# Altium PCB PCB1.PcbDoc
Units mm, origin at the board's own origin, x right, y up, seen from the top; angles counter-clockwise.
Board outline 66.93 x 66.29 mm, 2 copper layers (Top Layer, Bottom Layer); 6 components, 30 nets, 68 pads, 9 vias.
Unrouted connection lines stored in the file: 1.
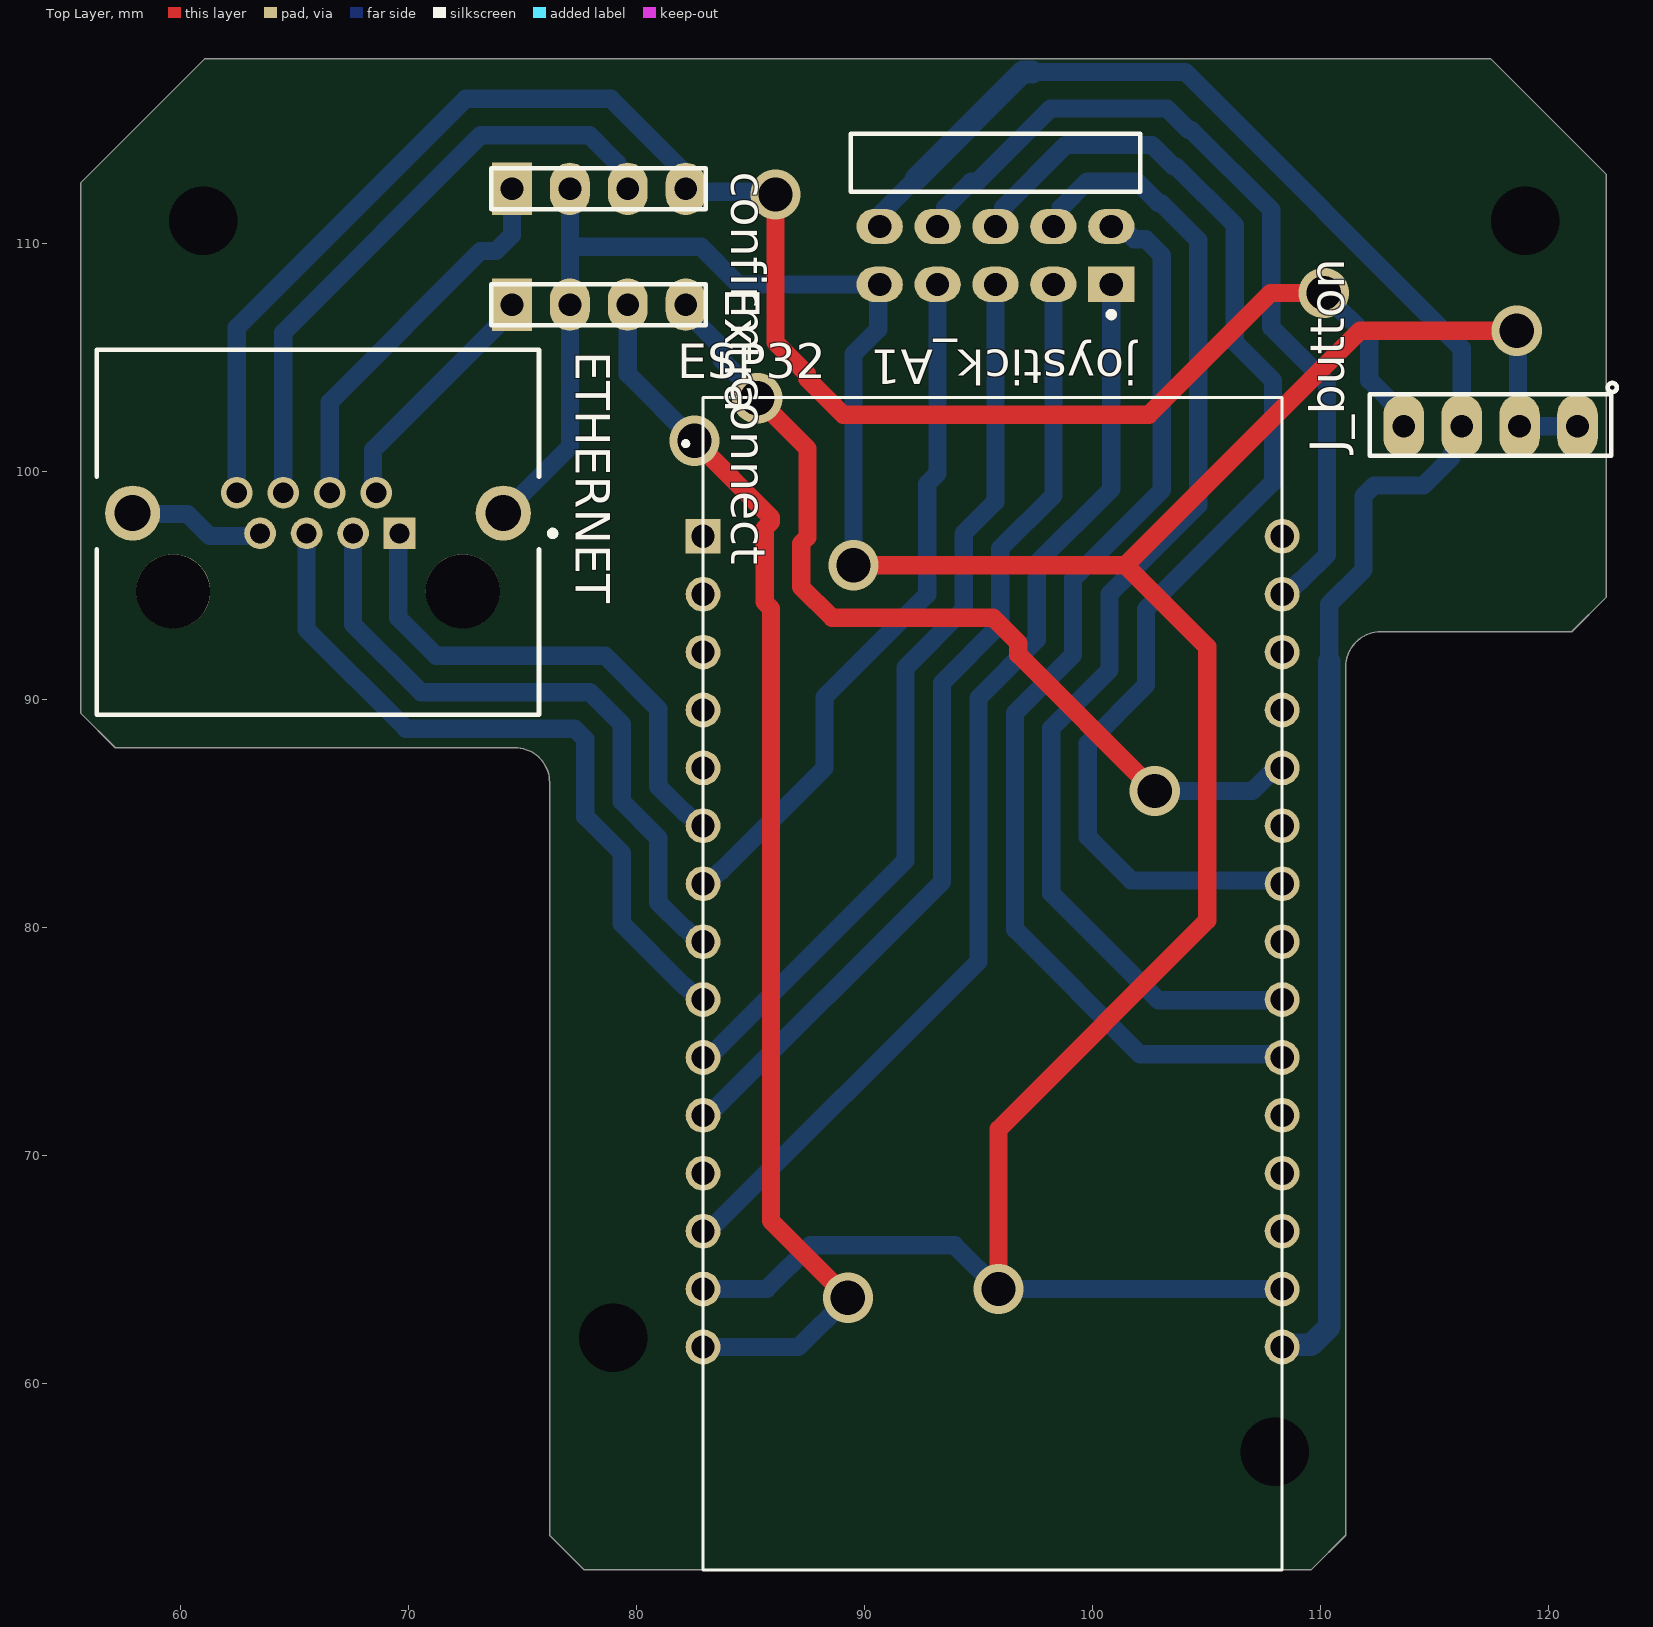
[diagram p0: Top Layer view]
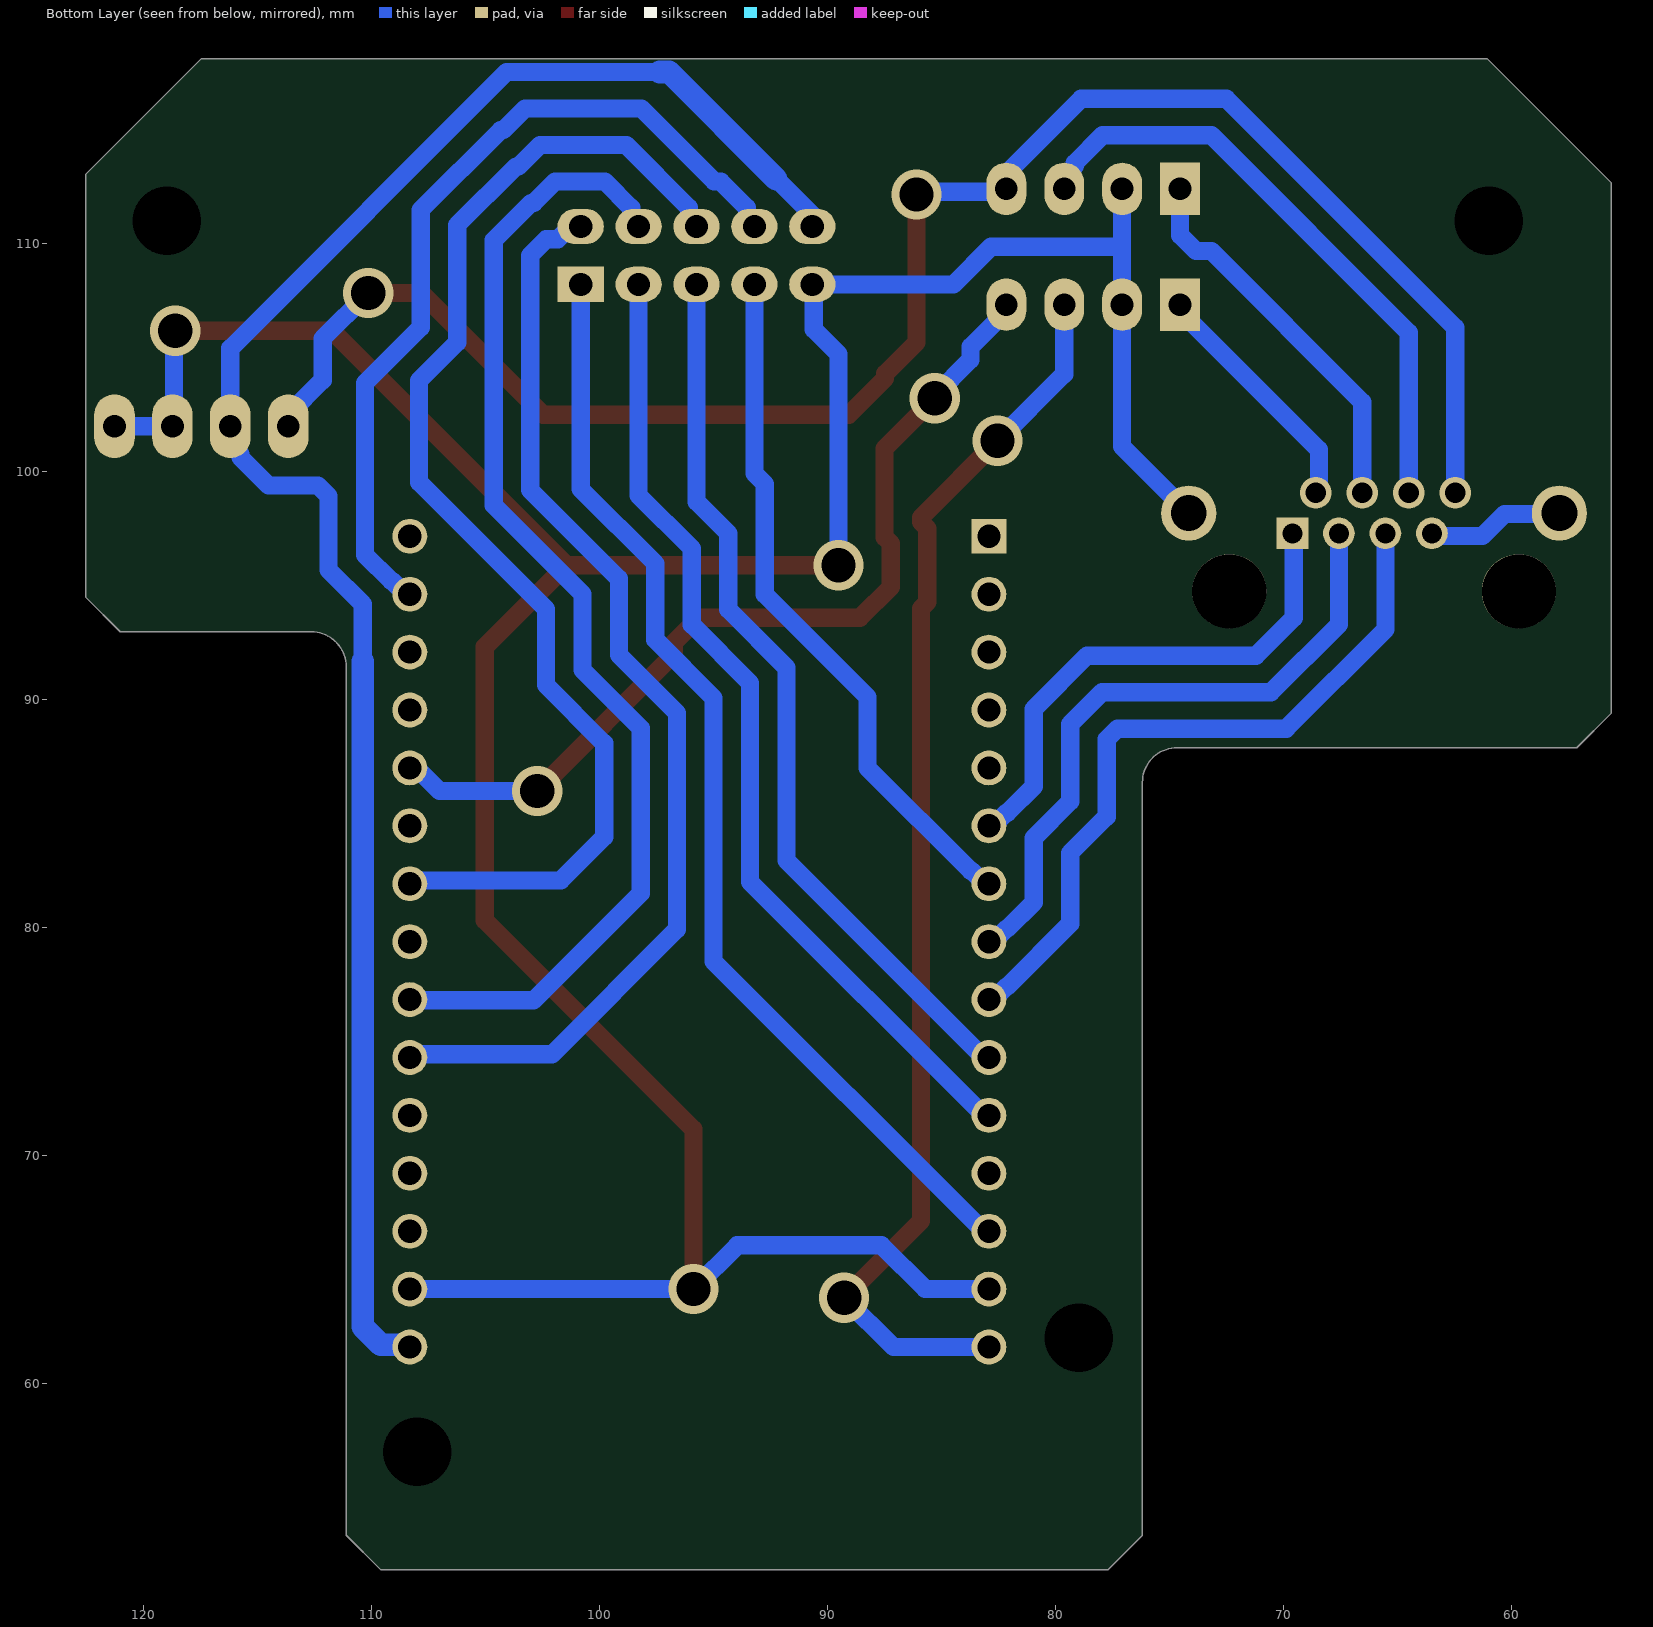
[diagram p1: Bottom Layer view, seen from below]

## Layer stack, top to bottom
Top Solder: solder mask 0.0102, Solder Resist, Dk 3.5
Top Layer: signal copper 0.0356
Dielectric 1: dielectric 0.32, FR-4, Dk 4.8
Bottom Layer: signal copper 0.0356
Bottom Solder: solder mask 0.0102, Solder Resist, Dk 3.5

## Board outline
76.2,53.34 76.2,86.36 ccw(c74.676,86.36) 74.676,87.884 57.15,87.884 55.626,89.408 55.626,112.649 61.087,118.11 117.475,118.11 122.555,113.03 122.555,94.488 121.031,92.964 112.649,92.964 ccw(c112.649,91.44) 111.125,91.44 111.125,53.34 109.601,51.816 77.724,51.816

## Design rules (kind name [scope] priority, off if disabled: settings)
Clearance [All] p1: gap=0.8 ignorepadtopadclearanceinfootprint=TRUE
HoleSize [All] p1: absolutevalues=TRUE maxlimit=2.54 minlimit=0.8 maxpercent=80.000 minpercent=20.000
PolygonConnect [All] p1: connectstyle=Relief reliefconductorwidth=0.254 reliefentries=4 polygonreliefangle="90 Angle" airgapwidth=0.254
RoutingVias [All] p1: holewidth=1.4 width=2.3 viastyle="Through Hole" minholewidth=1.4 minwidth=2.3 maxholewidth=1.4 maxwidth=2.3
SolderMaskExpansion [All] p1: expansion=0 istentingtop=FALSE
SupplyNets "Schematic Supply Nets" [InNet('GND')] p1: voltage=0.000
Width [All] p1: maxlimit=1 minlimit=0.8 preferedwidth=1 minimp=50.000000 maximp=50.000000 favimp=50.000000
29 further rules are at their usual default settings.

## Components (designator, comment, footprint, x,y, rotation, side; value= is the part's Value field where it differs from the comment)
confirm_connect "Header 1 x 4 2.54mm (100mil)" "New footprint 1" 74.549,112.395 r0 top
ESP32 "ESP32 DEV KIT V1" ESP32-DEV-KIT-V1 95.631,77.216 r0 top locked
ETHERNET "RJ45 (ethernet) connector" FP-1-406541-1-MFG 66.04,97.337 r0 top
Extra "Header 1 x 4 2.54mm (100mil)" "New footprint 1" 74.549,107.315 r0 top
J_button "HDR_F_1X4" HDR_F_1X4 117.475,101.981 r180 top value=HDRF4
joystick_A1 "68021-210HLF" FCI-68021-210HLF-10_V 95.758,109.474 r180 top

## Footprints (in the part's own frame and the unit in brackets; to place one, negate y for a bottom-side part, rotate by r counter-clockwise, add the part's x,y. Pads: shape width x height; smd on the part's side, far side on the other; paste and mask are expansions set on the pad)
ESP32-DEV-KIT-V1 [mm] "30 pin version"
  rect 1.53x1.53 hole 1.02: J1_1(-12.7,19.939)
  round 1.53 hole 1.02: J1_2(-12.7,17.399) J1_3(-12.7,14.859) J1_4(-12.7,12.319) J1_5(-12.7,9.779) J1_6(-12.7,7.239) J1_7(-12.7,4.699) J1_8(-12.7,2.159) J1_9(-12.7,-0.381) J1_10(-12.7,-2.921) J1_11(-12.7,-5.461) J1_12(-12.7,-8.001) J1_13(-12.7,-10.541) J1_14(-12.7,-13.081) J1_15(-12.7,-15.621) J3_1(12.7,19.939) J3_2(12.7,17.399) J3_3(12.7,14.859) J3_4(12.7,12.319) J3_5(12.7,9.779) J3_6(12.7,7.239) J3_7(12.7,4.699) J3_8(12.7,2.159) J3_9(12.7,-0.381) J3_10(12.7,-2.921) J3_11(12.7,-5.461) J3_12(12.7,-8.001) J3_13(12.7,-10.541) J3_14(12.7,-13.081) J3_15(12.7,-15.621)
  silkscreen extent -13.56,-25.4 12.7,26.04, body extent -14.08,-25.4 14.08,26.1, height 7.01
FCI-68021-210HLF-10_V [mm] "THD, 10-Leads, Body 12.7x2.54mm, Pitch 2.54mm"
  rect 2.032x1.55 hole 1.02: 1(-5.08,1.27)
  oval 2.032x1.55 hole 1.02: 2(-2.54,1.27) 3(0,1.27) 4(2.54,1.27) 5(5.08,1.27) 6(5.08,-1.27) 7(2.54,-1.27) 8(0,-1.27) 9(-2.54,-1.27) 10(-5.08,-1.27)
  silkscreen extent -6.35,-5.33 6.35,2.72, body extent -6.32,-11.13 6.32,1.64, height 4.83
FP-1-406541-1-MFG [mm]
  rect 1.39x1.39 hole 0.89 paste-2539.97 mask+0: 1(3.58,-0.055)
  round 1.39 hole 0.89 paste-2539.97 mask+0: 2(2.56,1.725) 3(1.54,-0.055) 4(0.52,1.725) 5(-0.5,-0.055) 6(-1.52,1.725) 7(-2.54,-0.055) 8(-3.56,1.725)
  round 2.42 hole 1.57 paste-2539.97 mask+0: 9(-8.13,0.835) 10(8.13,0.835)
  round 3.25 hole 3.25 unplated paste-2539.97 mask+0: ""(-6.35,-2.595) ""(6.35,-2.595)
  silkscreen extent -9.69,-8 10.42,8, body extent -9.79,-8.1 9.79,8.1, height 0.25
HDR_F_1X4 [mm] "HEADER FEMALE pitch: 2.54mm"
  oval 1.778x2.797 hole 1 mask+0.1: 1(-3.81,0) 2(-1.27,0) 3(1.27,0) 4(3.81,0)
  silkscreen extent -5.54,-1.9 5.3,1.3, body extent -5.2,-1.3 5.21,1.2, height 8.5
"New footprint 1" [mm]
  rect 1.75x2.3 hole 1: 1(0,0)
  oval 1.75x2.3 hole 1: 2(2.54,0) 3(5.08,0) 4(7.62,0)
  silkscreen extent -0.9,-0.9 8.51,0.9

## Part data
confirm_connect Extra: library part CMP-002-00605-1
ESP32: library part CMP-020-00026-4, "ESP-WROOM-32 https://www.aliexpress.com/item/1005006771532302.html", Package=None, Check_prices=https://www.aliexpress.com/item/1005006771532302.html, Component Type=Standard, Design Item ID="ESP32 DEV KIT V1", MF="Espressif Systems", MP=ESP-WROOM-32, Pin Count=30, SnapEDA_Link=https://www.snapeda.com/parts/ESP32-S3-DEVKITC-1-N8R8/Espressif+Systems/view-part/?ref=snap, Source=ESP32-S3-DEVKITC-1-N8R8.SchLib
ETHERNET: library part CMP-002-00604-1, "Modular Connector, RJ45 Jack, 1 x 1 (Port), 8P8C, Cat5, Through Hole Mount", Max Operating Temperature=85°C, Min Operating Temperature=-40°C, Gender=Female, Mounting Technology=Panel, Pins=2
J_button: library part CMP-002-00296-3, "Female header 1x4 2.54mm pitch", Component Type=Standard, Design Item ID=HDR_F_1X4, Kit=Rover2026, Location=v207, Pins=4, Source="Conn Header.SchLib"
joystick_A1: library part CMP-002-00020-2, "Male Header, Pitch 2.54 mm, 2 x 5 Position, Height 4.83 mm, Tail Length 3.05 mm, Bulk", Case/Package=68021-210HLF-10, Manufacturer="FCI Electronics", Package Description="Male Header, Pitch 2.54 mm, 2 x 5 Position, Height 4.83 mm, Tail Length 3.05 mm", Connector Type=Header, Datasheet URL=http://portal.fciconnect.com/Comergent//fci/drawing/68020.pdf, Datasheet Version="Rev. BM, 04/2015", Gender=Male, Manufacturer URL=http://portal.fciconnect.com/, Mounting Technology=TH, Package Reference=68021-210HLF-10, RoHS Compliant=Unknown

## Free pads (board coordinates)
  round 1.524 hole 3: 2(61,111) 2(79,62) 2(108,57) 2(119,111)

## Via types
v1: diameter 2.2, hole 1.5, Top Layer to Bottom Layer, 9 vias

## Nets (pads, with @x,y where several pads share a name; then routed paths per layer and width w, separated by ;. In a path a pad name is that pad's centre, name@x,y a point inside that pad or via, vN(x,y) a via of type N, cw(c..) or ccw(c..) an arc to the next point about the centre after c; other vN are vias at no path point)
GND: confirm_connect.2 ESP32.J1_14 ESP32.J3_14 ETHERNET.7 ETHERNET.9 ETHERNET.10 Extra.2 J_button.1 J_button.2 joystick_A1.5 | length 152.7
  Top Layer w0.8: v1(89.535,95.885) 101.469,95.885 ; v1(95.885,64.135) 95.885,71.144 105.043,80.302 105.043,92.311 101.469,95.885 ; v1(118.618,106.172) 111.756,106.172 101.469,95.885
  Bottom Layer w0.8: ETHERNET.9 57.946,98.136 60.32,98.136 61.289,97.167 63.225,97.167 63.34,97.282 ETHERNET.7 ; ETHERNET.10 77.089,101.091 Extra.2 77.089,109.855 ; confirm_connect.2 77.089,109.855 ; ESP32.J1_14 85.722,64.135 87.641,66.054 93.966,66.054 v1(95.885,64.135) ESP32.J3_14 ; v1(89.535,95.885) 89.535,105.154 90.61,106.229 90.61,108.136 joystick_A1.5 84.489,108.204 82.838,109.855 77.089,109.855 ; v1(118.618,106.172) 118.681,106.108 118.681,102.044 J_button.2 J_button.1
Net*_4: 
Net*_20: 
Net*_21: 
Net*_25: 
Net*_26: 
Net*_27: 
Net*_28: 
Net*_29: 
Net*_30: 
NetC1_1: 
NetC2_1: 
Netconfirm_connect_1: confirm_connect.1 ETHERNET.4 | length 17
  Bottom Layer w0.8: ETHERNET.4 66.56,103.048 73.177,109.665 73.851,109.665 74.549,110.363 confirm_connect.1
Netconfirm_connect_3: confirm_connect.3 ETHERNET.6 | length 27.1
  Bottom Layer w0.8: ETHERNET.6 64.52,106.088 73.177,114.745 77.948,114.745 79.164,113.529 79.164,113.392 79.629,112.927 confirm_connect.3
Netconfirm_connect_4: confirm_connect.4 ETHERNET.8 J_button.4 | length 78.6
  Top Layer w0.8: v1(86.106,112.141) 86.106,105.664 87.489,104.281 87.489,104.076 89.076,102.489 102.489,102.489 107.823,107.823 v1(110.154,107.823)
  Bottom Layer w0.8: ETHERNET.8 62.48,106.311 72.514,116.345 78.888,116.345 81.987,113.246 81.987,112.577 confirm_connect.4 82.296,112.268 85.979,112.268 v1(86.106,112.141) ; v1(110.154,107.823) 112.155,105.822 112.155,104.001 113.665,102.49 J_button.4
NetESP32_J1_6: ESP32.J1_6 ETHERNET.1 | length 22.9
  Bottom Layer w0.8: ETHERNET.1 69.565,97.227 69.565,93.572 71.22,91.917 78.623,91.917 80.966,89.574 80.966,86.181 82.117,85.03 82.158,85.03 82.733,84.455 ESP32.J1_6
NetESP32_J1_7: ESP32.J1_7 joystick_A1.4 | length 30.7
  Bottom Layer w0.8: ESP32.J1_7 83.129,81.915 83.704,82.49 83.745,82.49 88.253,86.999 88.253,90.097 92.762,94.605 92.762,99.454 93.218,99.91 joystick_A1.4
NetESP32_J1_8: ESP32.J1_8 ETHERNET.3 | length 28.7
  Bottom Layer w0.8: ETHERNET.3 67.58,93.294 70.557,90.317 77.96,90.317 79.366,88.911 79.366,85.518 80.966,83.918 80.966,82.729 80.966,81.101 82.117,79.95 82.158,79.95 82.733,79.375 ESP32.J1_8
NetESP32_J1_9: ESP32.J1_9 ETHERNET.5 | length 32.1
  Bottom Layer w0.8: ETHERNET.5 65.54,93.071 69.894,88.717 77.297,88.717 77.766,88.248 77.766,84.856 79.366,83.256 79.366,80.161 82.117,77.41 82.158,77.41 82.733,76.835 ESP32.J1_9
NetESP32_J1_10: ESP32.J1_10 joystick_A1.3 | length 39.4
  Bottom Layer w0.8: ESP32.J1_10 83.071,74.435 83.31,74.435 91.808,82.933 91.808,91.388 94.362,93.942 94.362,97.279 95.758,98.675 joystick_A1.3
NetESP32_J1_11: ESP32.J1_11 joystick_A1.2 | length 43
  Bottom Layer w0.8: ESP32.J1_11 83.071,71.895 83.31,71.895 93.408,81.993 93.408,90.726 95.962,93.28 95.962,96.616 98.298,98.952 joystick_A1.2
NetESP32_J1_13: ESP32.J1_13 joystick_A1.1 | length 49.1
  Bottom Layer w0.8: ESP32.J1_13 83.071,66.815 83.31,66.815 95.008,78.513 95.008,90.063 97.562,92.617 97.562,95.953 100.838,99.229 joystick_A1.1
NetESP32_J1_15: ESP32.J1_15 Extra.3 | length 55
  Top Layer w0.8: v1(82.55,101.346) 85.916,97.98 85.916,97.781 85.635,97.5 85.635,94.27 85.916,93.989 85.916,67.119 v1(89.281,63.754)
  Bottom Layer w0.8: Extra.3 79.629,104.267 v1(82.55,101.346) ; ESP32.J1_15 87.122,61.595 v1(89.281,63.754)
NetESP32_J3_2: ESP32.J3_2 joystick_A1.7 | length 37.7
  Bottom Layer w0.8: joystick_A1.7 93.542,111.068 93.542,111.562 94.699,112.719 94.976,112.719 98.176,115.919 103.283,115.919 104.223,114.979 104.339,114.979 107.854,111.464 107.854,106.317 110.296,103.875 110.296,96.341 109.145,95.19 109.104,95.19 108.529,94.615 ESP32.J3_2
NetESP32_J3_5: ESP32.J3_5 Extra.4 | length 40.2
  Top Layer w0.8: v1(85.305,103.212) 87.516,101.002 87.516,97.118 87.235,96.838 87.235,94.932 88.582,93.585 95.645,93.585 96.76,92.47 96.76,91.962 v1(102.743,85.979)
  Bottom Layer w0.8: Extra.4 82.169,107.04 83.742,105.467 83.742,104.901 85.305,103.338 v1(85.305,103.212) ; v1(102.743,85.979) 107.036,85.979 107.912,86.855 108.191,86.855 ESP32.J3_5
NetESP32_J3_7: ESP32.J3_7 joystick_A1.8 | length 54
  Bottom Layer w0.8: joystick_A1.8 96.082,111.068 96.082,111.562 98.839,114.319 102.62,114.319 103.56,113.379 103.677,113.379 106.254,110.802 106.254,105.655 107.925,103.984 107.925,99.528 102.362,93.965 102.362,90.629 99.808,88.075 99.808,83.961 101.714,82.055 108.191,82.055 ESP32.J3_7
NetESP32_J3_9: ESP32.J3_9 joystick_A1.9 | length 51.9
  Bottom Layer w0.8: joystick_A1.9 98.622,111.068 98.622,111.562 99.779,112.719 101.958,112.719 102.898,111.779 103.014,111.779 104.396,110.396 104.654,110.139 104.654,98.52 100.762,94.628 100.762,91.291 98.208,88.737 98.208,81.497 102.904,76.801 108.297,76.801 ESP32.J3_9
NetESP32_J3_10: ESP32.J3_10 joystick_A1.10 | length 49
  Bottom Layer w0.8: joystick_A1.10 101.282,110.744 101.847,110.179 102.351,110.179 103.054,109.476 103.054,99.182 99.162,95.29 99.162,91.954 96.608,89.4 96.608,79.922 102.095,74.435 108.191,74.435 ESP32.J3_10
NetESP32_J3_15: ESP32.J3_15 J_button.3 joystick_A1.6 | length 82.7
  Bottom Layer w0.8: joystick_A1.6 90.678,111.238 92.259,112.819 ; 97.372,117.519 104.087,117.519 116.205,105.401 J_button.3 116.205,101.207 115.754,100.756 115.754,100.606 114.53,99.382 112.365,99.382 111.896,98.914 111.896,95.678 110.396,94.178 110.396,91.678
  Bottom Layer w1: 92.259,112.819 96.959,117.519 97.372,117.519 ; ESP32.J3_15 108.431,61.695 109.61,61.695 110.396,62.481 110.396,91.678
NetETHERNET_2: ETHERNET.2 Extra.1 | length 10.4
  Bottom Layer w0.8: ETHERNET.2@68.455,99.441 68.455,100.946 74.549,107.04 Extra.1
pads on no net: ESP32.J1_1 ESP32.J1_2 ESP32.J1_3 ESP32.J1_4 ESP32.J1_5 ESP32.J1_12 ESP32.J3_1 ESP32.J3_3 ESP32.J3_4 ESP32.J3_6 ESP32.J3_8 ESP32.J3_11 ESP32.J3_12 ESP32.J3_13 ETHERNET.

## Silkscreen, mask and mechanical layers (free items; w line width, h text height)
Mechanical 1:
  lines w0.254: 55.626,89.408 55.626,112.649 61.087,118.11 96.393,118.11 117.475,118.11 122.555,113.03 122.555,94.488 121.031,92.964 112.649,92.964 ccw(c112.649,91.44) 111.125,91.44 111.125,53.34 109.601,51.816 77.724,51.816 76.2,53.34 76.2,86.36 ccw(c74.676,86.36) 74.676,87.884 57.15,87.884 55.626,89.408